# Altium PCB TMP116.PcbDoc
Units mil, origin at the board's own origin, x right, y up, seen from the top; angles counter-clockwise.
Board outline 6000 x 4000 mil, 2 copper layers (Top Layer, Bottom Layer); 5 components, 5 nets, 20 pads, 11 vias.
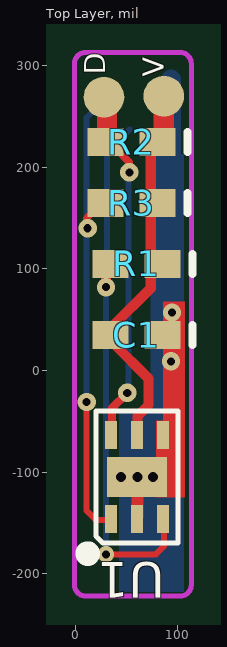
[diagram p0: Top Layer view]
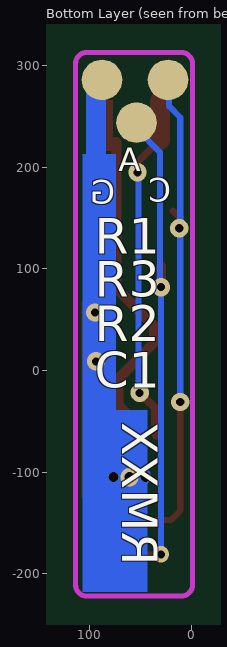
[diagram p1: Bottom Layer view, seen from below]

## Layer stack, top to bottom
Top Layer: signal copper 1.4
Dielectric: dielectric 12.6, FR-4, Dk 4.8
Bottom Layer: signal copper 1.4

## Board outline
-3979,-1907 2021,-1907 2021,2093 -3979,2093

## Design rules (kind name [scope] priority, off if disabled: settings)
Clearance [All] p1 off: gap=10
ComponentClearance [All] p1: gap=10 collisioncheckmode=3 verticalgap=10
PolygonConnect [All] p1: connectstyle=Relief reliefconductorwidth=10 reliefentries=4 polygonreliefangle="90 Angle"
RoutingVias [All] p1: holewidth=20 width=12 viastyle="Through Hole" minholewidth=6 minwidth=8 maxholewidth=100 maxwidth=150
SolderMaskExpansion [All] p1: expansion=4
TestPointUsage [All] p1: valid=0 allowmultiple=FALSE
Testpoint [All] p1: side=15 testpointundercomponent=TRUE minsize=40 maxsize=100 preferedsize=60 minholesize=0 maxholesize=40 preferedholesize=32 testpointgrid=1 style=1023 order=0123456789
Width [All] p1: maxlimit=100 minlimit=5 preferedwidth=10 minimp=50.000000 maximp=50.000000 favimp=50.000000
18 further rules are at their usual default settings.

## Components (designator, comment, footprint, x,y, rotation, side; value= is the part's Value field where it differs from the comment)
C1 "Cap Semi" 0402 60,35 r180 top
R1 "Res1" 0402 60,105 r180 top
R2 "Res1" 0402 55,225 r180 top
R3 "Res1" 0402 55,165 r180 top
U1 "Sensor" WSON 45,-105 r90 top

## Footprints (in the part's own frame and the unit in brackets; to place one, negate y for a bottom-side part, rotate by r counter-clockwise, add the part's x,y. Pads: shape width x height; smd on the part's side, far side on the other; paste and mask are expansions set on the pad)
0402 [mm] "Chip Capacitor; Body 1.0 x 0.5 mm (LxW typ)"
  rect 0.9x0.7 smd: 1(-0.65,0) 2(0.65,0)
  silkscreen extent -1.4,-0.25 -1.4,0.25
WSON [mm]
  rect 0.7x0.3 smd: 1(-1.05,0.25) 2(-1.05,-0.4) 3(-1.05,-1.05) 4(1.05,-1.05) 5(1.05,-0.4) 6(1.05,0.25)
  rect 1x1.5 smd: 2(0,-0.4)
  silkscreen extent -2.02,-1.42 1.65,0.95

## Part data
C1: "Capacitor (Semiconductor SIM Model)"
R1 R2 R3: "Resistor"
U1: library part TMP116

## Free pads (board coordinates)
  round 40 smd: 2(28,269) 2(87,270)
  round 40 smd far side: 3(23,286) 3(54,244) 3(88,286)

## Via types
v1: diameter 18, hole 8, Top Layer to Bottom Layer, 7 vias
v2: diameter 9.84, hole 9.84, Top Layer to Bottom Layer, 2 vias
v3: diameter 18, hole 10, Top Layer to Bottom Layer, 1 vias
v4: diameter 16, hole 8, Top Layer to Bottom Layer, 1 vias

## Nets (pads, with @x,y where several pads share a name; then routed paths per layer and width w, separated by ;. In a path a pad name is that pad's centre, name@x,y a point inside that pad or via, vN(x,y) a via of type N, cw(c..) or ccw(c..) an arc to the next point about the centre after c; other vN are vias at no path point)
ALT: pad.3@54,244 R1.2 U1.3 | length 537.1
  Top Layer w6: v4@29.34,-181 79,-181 87,-173 U1.3@87,-149
  Top Layer w8: U1.3@86,-146 U1.3@86.02,-145
  Top Layer w10: v1(30,82) R1.2@30,103
  Bottom Layer w6: v4(30,-181) v1@30,84 ; v1@31,81 31,215 pad.3@53,237
GND: C1.1 pad.3@88,286 U1.2 U1.4 | length 454.6
  Top Layer w6: U1.2@61,-147 U1.2@60.99,-146.34
  Top Layer w12: U1.2@61,-144 U1.2@61,-120
  Bottom Layer w20: 50,-104 87,-104 94,-97 pad.3@94,286
  other v1: 94,9 95,57
  other v2: 45,-105 76.5,-105
  other v3: 61,-105
SCL: pad.3@23,286 R3.2 U1.1 | length 472.6
  Top Layer w6: v1@10,-31 11,-32 11,-138 20,-147 U1.1@35,-147
  Top Layer w7: v1@11,141 11,150 R3.2@18,157
  Bottom Layer w6: v1(11,-31) 11,249 22,260 pad.3@22,283
  other v1: 12,140
SDA: pad.2@28,269 R2.2 U1.6 | length 321.5
  Top Layer w7: R2.2@41,217 53,205 v1(53,195)
  Top Layer w8: U1.6@35,-64 U1.6@35,-63.66 ; U1.6@36,-54 36,-37 v1(51,-22)
  Top Layer w20: R2.2@31,227 pad.2@31,265
  Bottom Layer w6: v1@52,-22 v1@52,193 ; v1@53,194 v1@53,197
VCC: C1.2 pad.2@87,270 R1.1 R2.1 R3.1 U1.5 | length 326.4
  Top Layer w10: U1.5@61,-67 61,-45 72,-34 72,-8 37,27 37,44 74,81 R2.1@74,225

## Keep-outs
Keep-Out Layer:
  lines w5: 103,313 cw(c103,302) 114,302 114,-211 cw(c103,-211) 103,-222 10,-222 cw(c10,-211) -1,-211 -1,302 cw(c10,302) 10,313 104,313

## Other copper
Top Layer:
  rectangle net GND: 86,-62 108,68
  rectangle net GND: 79,-125 108,-49
  rectangle net VCC: 77,216 97,266
Bottom Layer:
  rectangle net GND: 74,-65 107,213
  rectangle net GND: 43,-218 107,-39

## Silkscreen, mask and mechanical layers (free items; w line width, h text height)
Top Overlay:
  text "D" at 36,291 h35 r90
  text "V" at 94,289 h35 r90
Bottom Overlay:
  text "A" at 50,188 h40
  text "C" at 20,158 h40
  text "G" at 75,156 h40
  text "RMXX" at 80,-192 h60 r90